# Altium PCB PCB1.PcbDoc
Units mm, origin at the board's own origin, x right, y up, seen from the top; angles counter-clockwise.
Board outline 90 x 60 mm, 2 copper layers (Top Layer, Bottom Layer); 25 components, 19 nets, 73 pads, 8 vias.
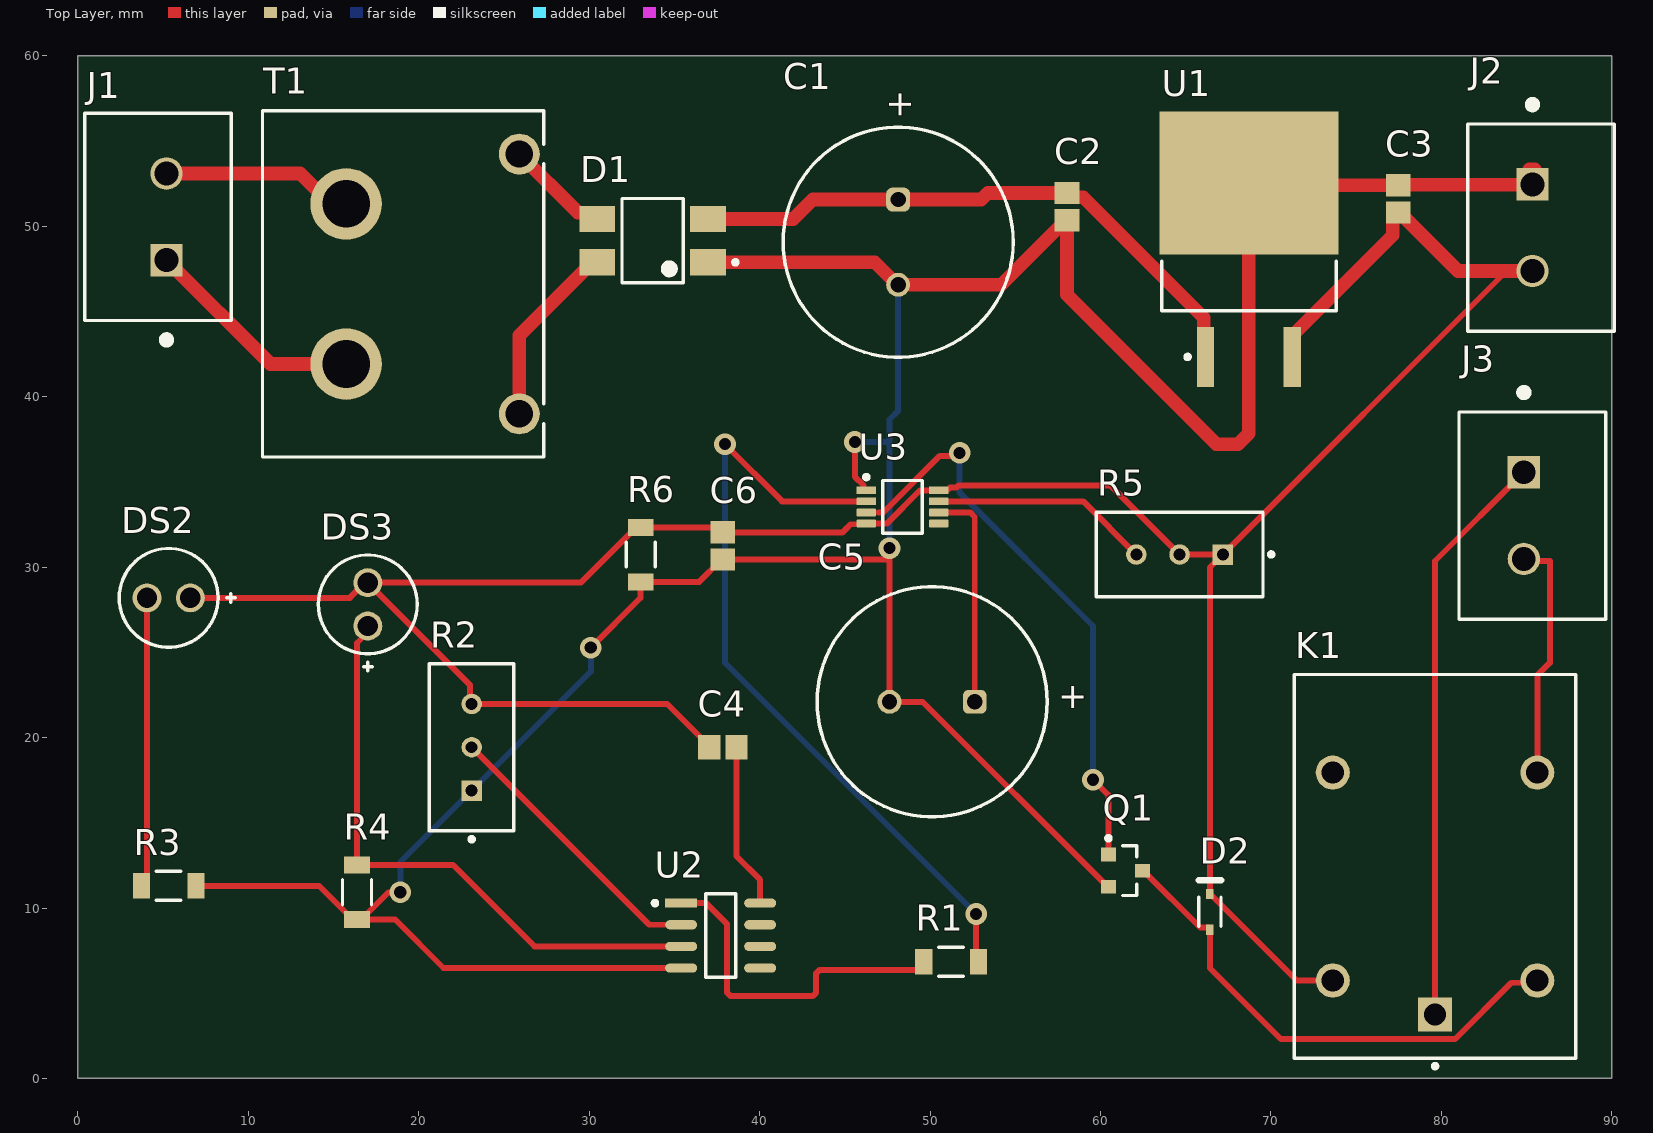
[diagram p0: Top Layer view]
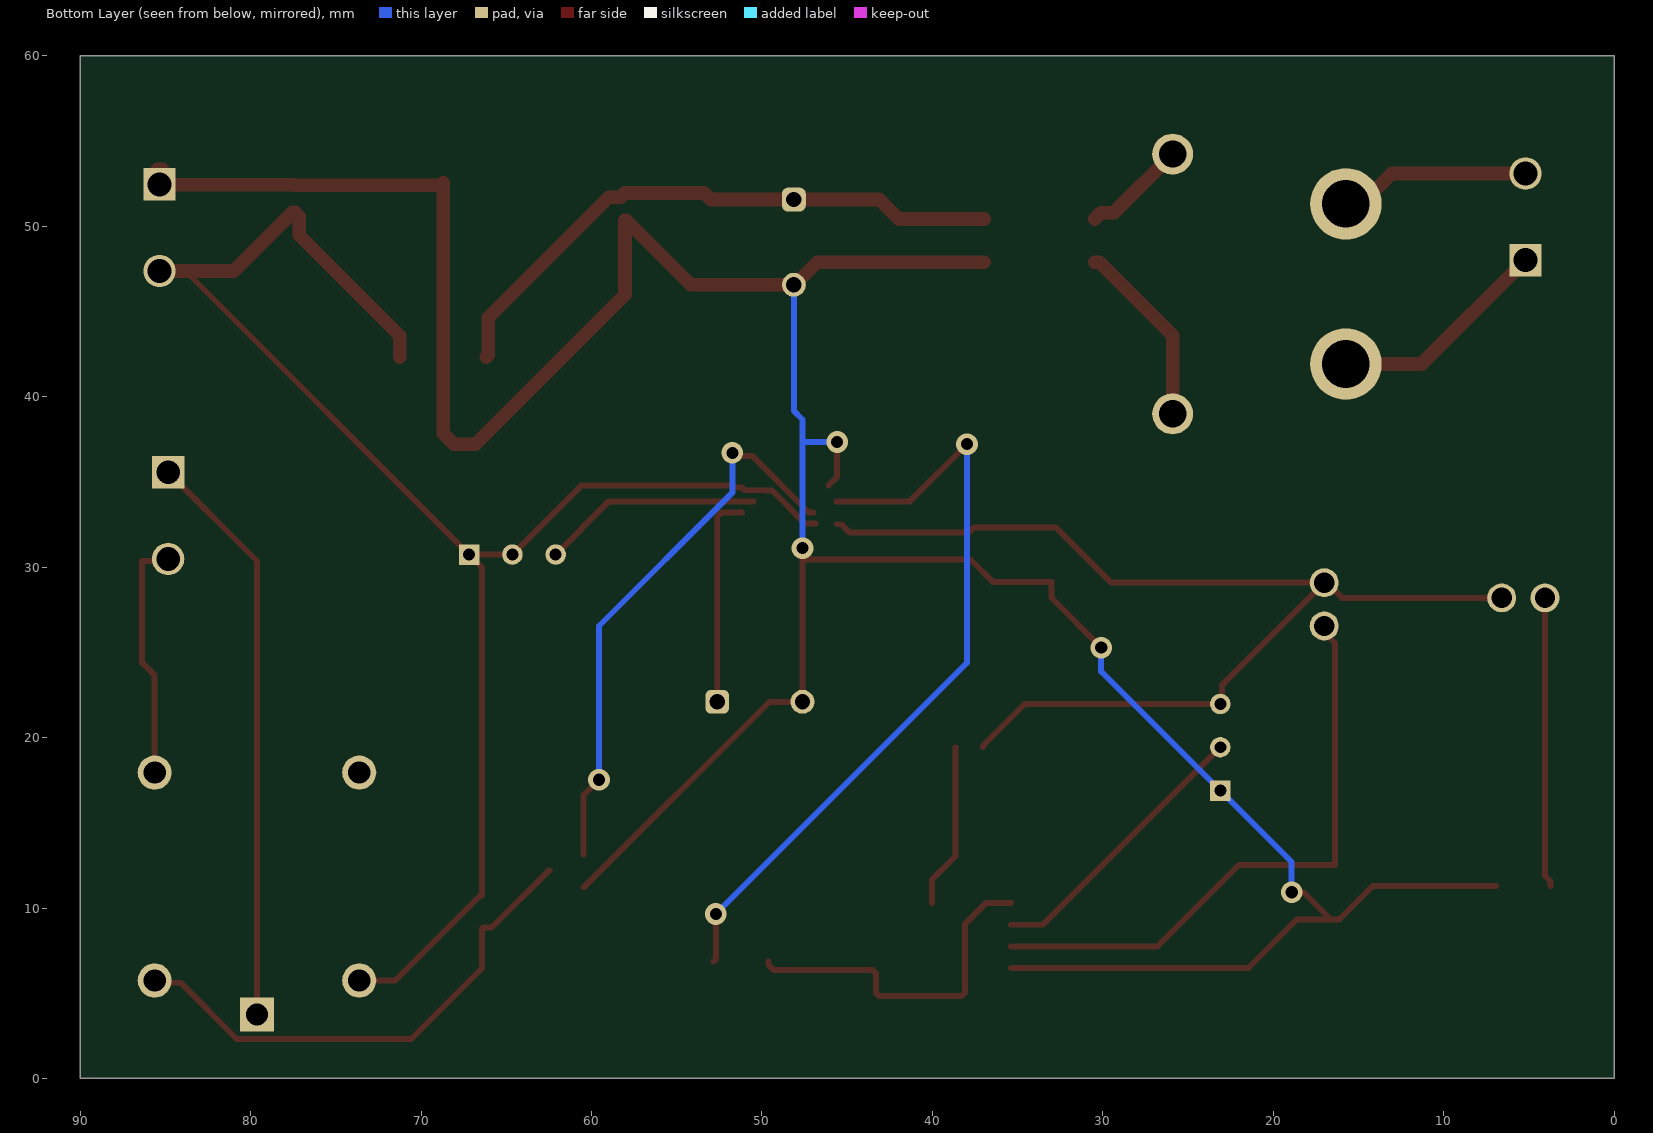
[diagram p1: Bottom Layer view, seen from below]
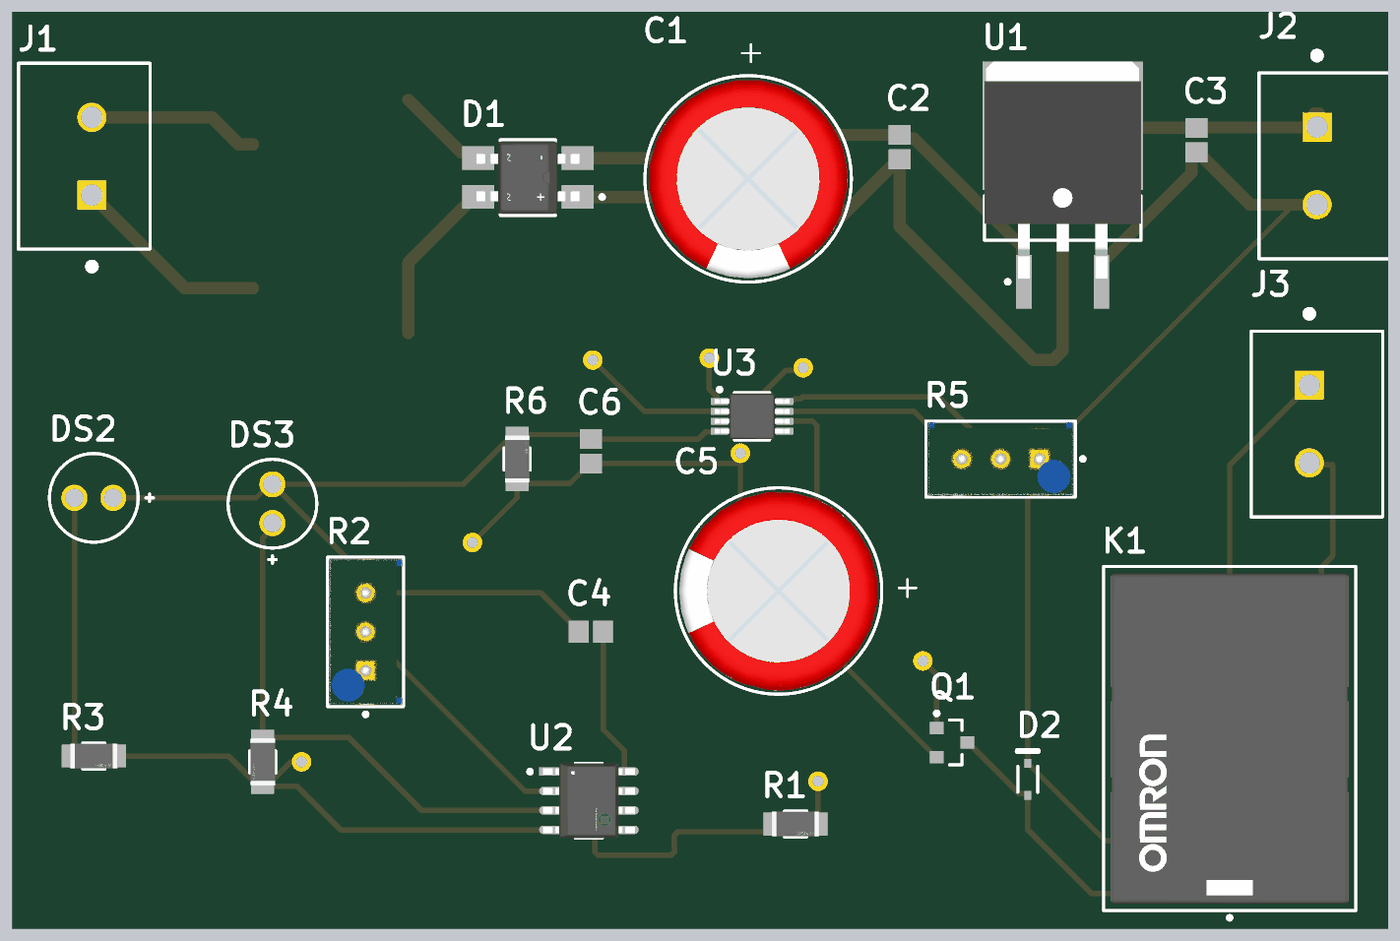
[diagram p2: 3D render of the assembled board from above, using the file's embedded part models]

## Layer stack, top to bottom
Top Solder: solder mask 0.0102, Solder Resist, Dk 3.5
Top Layer: signal copper 0.0356
Dielectric 1: dielectric 0.32, FR-4, Dk 4.8
Bottom Layer: signal copper 0.0356
Bottom Solder: solder mask 0.0102, Solder Resist, Dk 3.5

## Board outline
0,0 0,60 90,60 90,0

## Design rules (kind name [scope] priority, off if disabled: settings)
Clearance [All] p1: gap=0.1 ignorepadtopadclearanceinfootprint=FALSE
HoleSize [All] p1: absolutevalues=TRUE maxlimit=5 minlimit=0.025 maxpercent=80.000 minpercent=20.000
HoleToHoleClearance [All] p1: gap=0.1 allowstackedmicrovias=TRUE
MinimumSolderMaskSliver [All] p1: minsoldermaskwidth=0.1
PolygonConnect [All] p1: connectstyle=Relief reliefconductorwidth=0.254 reliefentries=4 polygonreliefangle="90 Angle" airgapwidth=0.254
RoutingVias [All] p1: holewidth=0.711 width=1.27 viastyle="Through Hole" minholewidth=0.711 minwidth=1.27 maxholewidth=0.711 maxwidth=1.27
SilkToSilkClearance [All] p1: silktosilkclearance=0.1
SilkToSolderMaskClearance [IsPad] p1: minsilkscreentomaskgap=0.1 clearancetoexposedcopper=TRUE
SolderMaskExpansion [All] p1: expansion=0 istentingtop=FALSE
SupplyNets "Schematic Supply Nets_1" [InNet('GND')] p1: voltage=0.000
SupplyNets "Schematic Supply Nets" [InNet('+5')] p2: voltage=0.000
Width [All] p1: maxlimit=5 minlimit=0.254 preferedwidth=0.35
25 further rules are at their usual default settings.

## Components (designator, comment, footprint, x,y, rotation, side; value= is the part's Value field where it differs from the comment)
C1 "470uF" WCAP-ATLI_D13H25 48.133,49.062 r90 top
C2 "0.1uF" CAPC2013X145X50NL20T25 58.039,51.143 r270 top
C3 "0.1uF" CAPC2013X145X50NL20T25 77.47,51.6 r90 top
C4 "0.1uF" CAPC2013X145X50NL20T25 37.846,19.431 r0 top
C5 "1000uF" WCAP-ATLI_D13H25 50.125,22.098 r0 top
C6 "0.1uF" CAPC2013X145X50NL20T25 37.846,31.242 r270 top
D1 "MB10S" FP-751EP-MFG 33.73,49.149 r180 top
D2 "1N4148WS-7-F" DIOD-SOD323-2-A_V 66.421,9.779 r90 top
DS2 "IR_TX1" VISH-TSAL6200 5.334,28.194 r180 top
DS3 "IR_RX1" VISH-TSAL6200 17.018,27.813 r90 top
J1 "1755736" PHOE-1755736-2_V 5.207,50.546 r90 top
J2 "1755736" PHOE-1755736-2_V 85.344,49.911 r270 top
J3 "1755736" PHOE-1755736-2_V 84.836,33.02 r270 top
K1 "G5LE-1-E DC5" FP-G5LE-1-E_DC5-MFG 79.629,12.446 r90 top
Q1 "BC847CLT1G" ONSC-SOT-23-3-318-08_V 61.468,12.192 r0 top
R1 "330" FP-AC1206-MFG 51.232,6.858 r0 top value=6.2KΩ
R2 "10k" FP-3296W-MFG#1 23.109,19.431 r0 top
R3 "100" FP-AC1206-MFG 5.334,11.303 r0 top value=6.2KΩ
R4 "1k" FP-AC1206-MFG 16.383,10.922 r270 top value=6.2KΩ
R5 "3296W-1-105LF" FP-3296W-MFG#2 64.643,30.734 r90 top
R6 "1k" FP-AC1206-MFG 33.02,30.734 r90 top value=191Ω
T1 "230VAC to 5VAC" WE-CSTLF_EI187 -1250.907,-1223.39 r180 top
U1 "MC7805CD2TR4G" ONSC-D2PAK-3-936-03_V 68.707,48.641 r90 top
U2 "LM358DR2G" FP-751-07-IPC_C 37.719,8.382 r0 top
U3 "LMC555CMMX" DGK0008A_L 48.387,33.528 r0 top

## Footprints (in the part's own frame and the unit in brackets; to place one, negate y for a bottom-side part, rotate by r counter-clockwise, add the part's x,y. Pads: shape width x height; smd on the part's side, far side on the other; paste and mask are expansions set on the pad)
CAPC2013X145X50NL20T25 [mm] "Chip Capacitor, 2-Leads, Body 2.00x1.25mm, IPC Medium Density"
  rect 1.3x1.45 smd: 1(-0.8,0) 2(0.8,0)
  body extent -1.1,-0.72 1.1,0.72, height 1.45
DGK0008A_L [mm] "TSOP, 8-Leads, Body 3.1x3.1mm, Pitch 0.65mm, IPC High Density"
  rrect22% 1.15x0.45 smd: 1(-2.125,0.975) 2(-2.125,0.325) 3(-2.125,-0.325) 4(-2.125,-0.975) 5(2.125,-0.975) 6(2.125,-0.325) 7(2.125,0.325) 8(2.125,0.975)
  silkscreen extent -2.25,-1.55 1.15,1.87, body extent -2.45,-1.5 2.45,1.5, height 0.94
DIOD-SOD323-2-A_V [mm] "SOD-323, 2-Leads, Body 1.7x1.3mm"
  rect 0.59x0.45 smd: 1(-1.055,0) 2(1.055,0)
  silkscreen extent -0.85,-0.65 1.85,0.65, body extent -0.85,-0.65 0.85,0.65, height 1.2
FP-751-07-IPC_C [mm]
  rect 1.874x0.543 smd paste+0 mask+0: 1(-2.316,1.905)
  rrect100% 1.874x0.543 smd paste+0 mask+0: 2(-2.316,0.635) 3(-2.316,-0.635) 4(-2.316,-1.905) 5(2.316,-1.905) 6(2.316,-0.635) 7(2.316,0.635) 8(2.316,1.905)
  silkscreen extent -3.98,-2.45 0.88,2.45, body extent -3.35,-2.55 3.35,2.55, height 0.25
FP-751EP-MFG [mm]
  rect 2.1x1.55 smd paste+0 mask+0: 1(-3.25,1.27) 2(-3.25,-1.27) 3(3.25,-1.27) 4(3.25,1.27)
  silkscreen extent -4.98,-2.47 1.8,2.47, body extent -4.4,-2.58 4.4,2.58, height 0.25
FP-3296W-MFG#1 [mm]
  rect 1.2x1.2 hole 0.7 paste-2539.97 mask+0: 1(0.005,-2.54)
  round 1.2 hole 0.7 paste-2539.97 mask+0: 2(0.005,0) 3(0.005,2.54)
  silkscreen extent -2.48,-5.52 2.48,4.89, body extent -2.58,-4.99 2.58,4.99, height 0.25
FP-3296W-MFG#2 [mm]
  rect 1.2x1.2 hole 0.7 paste-2539.97 mask+0: 1(0,-2.54)
  round 1.2 hole 0.7 paste-2539.97 mask+0: 2(0,0) 3(0,2.54)
  silkscreen extent -2.48,-5.5 2.48,4.89, body extent -2.58,-4.99 2.58,4.99, height 0.25
FP-AC1206-MFG [mm]
  rect 1x1.5 smd paste+0 mask+0: 1(-1.6,0) 2(1.6,0)
  silkscreen extent -0.72,-0.85 0.72,0.85, body extent -2.2,-0.95 2.2,0.95, height 0.25
FP-G5LE-1-E_DC5-MFG [mm]
  rect 2x2 hole 1.3 paste-2539.97 mask+0: 1(-8.7,0)
  round 2 hole 1.3 paste-2539.97 mask+0: 2(-6.7,-6) 3(5.5,-6) 4(5.5,6) 5(-6.7,6)
  silkscreen extent -11.85,-8.25 11.25,8.25, body extent -11.35,-8.35 11.35,8.35, height 0.25
ONSC-D2PAK-3-936-03_V [mm] "DPAK, 3-Leads, Body 10.24x9.35mm, Pitch 2.54mm"
  rect 3.504x1.016 smd: 1(-6.313,2.54) 3(-6.313,-2.54)
  rect 8.38x10.49 smd: 4(3.9,0)
  silkscreen extent -6.44,-5.12 -0.69,5.12, body extent -6.11,-5.13 8.09,5.13, height 4.75
ONSC-SOT-23-3-318-08_V [mm] "SOT23, 3-Leads, Body 2.92x1.3mm, Pitch 0.95mm"
  rect 0.9x0.8 smd: 1(-1,0.95) 2(-1,-0.95) 3(1,0)
  silkscreen extent -1.12,-1.46 0.65,2.02, body extent -0.65,-1.46 0.65,1.46, height 1.11
PHOE-1755736-2_V [mm] "THD, 2-Leads, Body 12.16x8.6mm, Pitch 5.08mm"
  rect 1.9x1.9 hole 1.4: 1(-2.54,0)
  round 1.9 hole 1.4: 2(2.54,0)
  silkscreen extent -7.42,-3.8 6.08,4.8, body extent -6.08,-3.8 6.08,4.8, height 12
VISH-TSAL6200 [mm] "THD, 2-Leads, Dia 5.8mm, Pitch 2.54mm"
  round 1.7 hole 1.2: 1(-1.27,0) 2(1.27,0)
  silkscreen extent -3.9,-2.9 2.9,2.9
WCAP-ATLI_D13H25 [mm] "Aluminum Electrolytic Capacitors, 13x25mm"
  rrect50% 1.4x1.4 hole 0.9: 1(2.5,0)
  round 1.4 hole 0.9: 2(-2.5,0)
  silkscreen extent -6.75,-6.75 6.75,6.75, body extent -6.49,-6.5 6.5,6.5, height 25.31
WE-CSTLF_EI187 [mm] "Current Sense Transformer, body 16.50 x 20.30 mm"
  round 4.2 hole 2.8: 1(-1266.655,-1274.7) 2(-1266.655,-1265.3)
  round 2.4 hole 1.6: 3(-1276.815,-1262.38) 4(-1276.815,-1277.62)
  silkscreen extent -1278.25,-1280.15 -1261.75,-1259.85, body extent -1277.82,-1279.65 -1262.19,-1260.35, height 16.81

## Part data
C1 C5: library part CMP-03913-54218056-2, "Cap, 2700Uf, 16V, Alu Elec, Radial Rohs Compliant: Yes", Capacitance=2.7mF, Case/Package=Radial, Leakage Current=432µA, Max Operating Temperature=105°C, Min Operating Temperature=-55°C, Ripple Current=3A, Tolerance=20%, Voltage Rating=16V, Diameter=13mm, Height - Seated (Max)=26.4922mm, Impedance=22mΩ, Lead Pitch=5.0038mm, Length=25mm, Life (Hours)=5000hours, Mount="Through Hole", Packaging="Tape & Box (TB)", Pitch=5mm, Polarity=Polar, RoHS=Compliant
C2 C3 C4 C6: library part CMP-2007-01227-1, Manufacturer=Kemet, Part Number=C0805S104K5RACTU
D1: library part CMP-07163-000045-1, "BRIDGE RECT 1P 1KV 500MA 4SOIC", Average Rectified Current=500mA, Capacitance=470pF, Case Code (Imperial)=1206, Case Code (Metric)=3216, Case/Package=SOIC, Forward Current=800mA, Forward Voltage=1V, Max Forward Surge Current (Ifsm)=35A, Max Operating Temperature=150°C, Max Power Dissipation=1.4W, Max Repetitive Reverse Voltage (Vrrm)=1kV, Min Operating Temperature=-55°C, Package Quantity=500, Peak Reverse Current=5uA, Tolerance=10%, Voltage Rating=500V, Contact Plating=Tin, Element Configuration=Single, Height=2.7mm, Height - Seated (Max)=0.354inch, Lead Free="Lead Free", Lead Pitch=0.197inch, Lead/Base Style="Formed Leads", Length=4.95mm, Max Surge Current=35A, Mount="Surface Mount", Number of Elements=1, Number of Pins=4, Packaging="Tape and Reel", Peak Non-Repetitive Surge Current=35A, Radiation Hardening=No, REACH SVHC="No SVHC", Reverse Voltage (DC)=1kV, Thickness=0.039inch, Weight=0.228g, Width=4.2mm
D2: library part CMP-1667-00004-1, "Fast Switching Diode, 75 V, 0.3 A, -65 to 150 degC, 2-Pin SOD323, RoHS, Tape and Reel", ComponentLink1Description="Manufacturer URL", ComponentLink1URL=http://www.diodes.com/, ComponentLink2Description=Datasheet, ComponentLink2URL=http://www.diodes.com/datasheets/ds30097.pdf, DatasheetVersion="Rev. 25-2, 03/2016", PackageDescription="2-Pin Small Outline Diode, Body 1.7 x 1.3 mm", PackageReference=SOD323-2
DS2 DS3: library part CMP-2000-07327-1, "High Power Infrared Emitting Diode, GaAlAs, MQW, 1.35 V, 100 mA, -40 to 85 degC, 2-Pin THD, RoHS, Bulk", Forward Current=100mA, Forward Voltage=3V, Manufacturer=Vishay, Operating Temp Range=-40Cto85C, Operating Temperature Classification=Industrial, Package Description="2-Pin Through Hole Device, Dia 5.8 mm, Pitch 2.54 mm", Package Reference=TSAL6200, Package Type=T-13/4, Power Dissipation=160W, Reverse Voltage=5V, Chip Material=GaAlAs, Datasheet URL=http://www.vishay.com/docs/81010/tsal6200.pdf, Datasheet Version="Rev. 2.4, 03/2014", DELETED=Compliant, High Brightness=Yes, Lens Dimensions=5x5x7.7mm, Lens Type=Colored, Lum Intensity=500mW/srmcd, Luminous Intensity=500mW/sr, Main Category=IrLED, Manufacturer URL=http://www.vishay.com/, Mounting=ThroughHole, Mounting Technology=ThroughHole, Number of  Elements=1, Packaging=Bulk, Peak Wavelength=950nm, Pin Count=2, Product Depth (mm)=5.8mm, Product Height (mm)=8.7mm, Product Length (mm)=5.8mm, Rad Hardened=No, Shape Type=Circular, Test Current (It)=100mA, Type=IrLED, Viewing Angle=34deg
J1 J2 J3: library part CMP-2000-05300-1, "Male Header, Pitch 5.08 mm, 1 x 2 Postion, Height 12 mm, Tail Length 3.9 mm, RoHS, Bulk", Colour=Green, Manufacturer="Phoenix Contact", Content=250pc(s), Datasheet URL=http://www.mouser.com/ds/2/324/ItemDetail_1755736-921028.pdf, Datasheet Version=Apr-16, Industrial packaging=Yes, Manufacturer part No.=1755736, Manufacturer URL=http://www.phoenixcontact.com/, Number of contacts=2, Pitch=5.08mm, Type=MSTBVA2,5/2-G-5,08
K1: library part CMP-08822-000286-1, "RELAY GEN PURPOSE SPDT 16A 5V", Coil Current=79.4mA, Coil Power=400mW, Coil Resistance=63R, Coil Voltage (DC)=5V, Contact Current Rating=16A, Max Operating Temperature=85°C, Max Voltage Rating (AC)=250V, Min Operating Temperature=-25°C, Package Quantity=100, Coil Type=Non-Latching, Contact Material=Tin, Depth=16.5mm, Height=19mm, Lead Free="Lead Free", Length=22.5mm, Life (Hours)=1000000Hour, Max Current Rating=16A, Mount=PCB, Number of Pins=5, Operate Time=10ms, Packaging=Rail/Tube, Power Consumption=400mW, Radiation Hardening=No, Relay Type="General Purpose", Release Time=5ms, RoHS Compliant=Yes, Series=G5LE, Termination=Solder, Throw Configuration=SPDT, Weight=12g, Width=16.5mm
Q1: library part CMP-1048-00770-1, "General Purpose Transistor, NPN Silicon, 3-Pin SOT-23, Pb-Free, Tape and Reel", Manufacturer="On Semiconductor", ComponentLink1Description="Manufacturer URL", ComponentLink1URL=http://www.onsemi.com/, ComponentLink2Description=Datasheet, ComponentLink2URL=http://www.onsemi.cn/pub_link/Collateral/BC846ALT1-D.PDF, ComponentLink3Description="Package Specification", ComponentLink3URL=http://www.onsemi.cn/pub_link/Collateral/318-08.PDF, DatasheetVersion="Rev. 11", fT Min (MHz)=100, IC Continuous (A)=0.1, Mounting Technology="Surface Mount", PackageDescription="3-Pin Small Outline Transistor, Body 2.92 x 1.3 mm, Pitch 0.95 mm", PackageReference=SOT-23-3-318-08, PackageVersion="Rev. AP, 11/2009", Packing="Tape and Reel", PartNumber=BC847CLT1G, Polarity=NPN, RoHS=TRUE
R1 R3 R4: library part CMP-03412-006130-1, "RES SMD 6.2K OHM 5% 1/4W 1206", Manufacturer=Yageo, Manufacturer Part Number=AC1206JR-076K2L, Package=AC1206, Power Rating=0.25W, Resistance=6.2KΩ, Temperature="-55°C to +155°C", Temperature Range High=+155°C, Temperature Range Low=-55°C, Tolerance=0.05, Voltage Rating=200V, Automotive=Yes, Automotive Grade="Grade 0", Category=Res, ComponentLink2Description=Datasheet, ComponentLink2URL=http://www.yageo.com/NewPortal/yageodocoutput?fileName=/pdf/R-Chip/PYu-AC_51_RoHS_L_6.pdf, Composition="Thick Film", Device Class L1="Passive Components", Device Class L2=Resistors, Device Class L3="Chip SMD Resistors", Digikey Description="RES SMD 6.2K OHM 5% 1/4W 1206", Footprint Url=http://www.yageo.com/exep/pages/download/literatures/PYu-R_Mount_10.pdf, Height=0.65mm, Ipc Land Pattern Name=RESC310160X55, Lead Free=Yes, Mouser Description="Thick Film Resistors - SMD 1/4W 6.2K ohm 5% AEC-Q200", Octopart=https://octopart.com/ac1206jr-076k2l-yageo-30511322, RoHS=TRUE, Series=AC
R2: library part CMP-1747-00001-8, "TRIMMER 10K OHM 0.5W PC PIN TOP", Color=Blue, Insulation Resistance=1GR, Max Operating Temperature=125°C, Max Power Dissipation=500mW, Min Operating Temperature=-55°C, Package Quantity=50, Resistance=10kR, Resistance Tolerance=10%, Resistor Type=Cermet, Temperature Coefficient=100ppm/°C, Contact Plating=Tin, Depth=4.83mm, Height=11.55mm, Lead Free="Lead Free", Length=9.53mm, Military Standard=Not, Mount="Through Hole", Number of Turns=25, Packaging=Rail/Tube, Power Rating=500mW, Radiation Hardening=No, Reach SVHC Compliant=Yes, RoHS Compliant=Yes, Series=3296, Taper=Linear, Technology=CERMET, Termination=Pin, Tolerance=10%, Weight=0.03oz, Width=9.53mm
R5: library part CMP-07234-000060-1, "TRIMMER 1M OHM 0.5W PC PIN TOP", Color=Blue, Max Operating Temperature=125°C, Max Power Dissipation=500mW, Min Operating Temperature=-55°C, Package Quantity=50, Resistance=1MR, Resistance Tolerance=10%, Resistor Type=Cermet, Temperature Coefficient=100ppm/°C, Voltage Rating=300V, Contact Plating=Tin, Depth=4.83mm, Height=0.395inch, Lead Diameter=0.5mm, Lead Free="Lead Free", Length=9.53mm, Military Standard=Not, Mount="Through Hole", Number of Turns=25, Packaging=Rail/Tube, Power Rating=500mW, Radiation Hardening=No, Reach SVHC Compliant=Yes, RoHS Compliant=Yes, Series=3296, Taper=Linear, Technology=CERMET, Termination=Pin, Tolerance=10%, Type=Potentiometer, Voltage Rating (DC)=300V, Weight=0.03oz, Width=9.53mm
R6: library part CMP-03412-028020-1, "RES SMD 191 OHM 1% 1/4W 1206", Manufacturer=Yageo, Manufacturer Part Number=AC1206FR-07191RL, Package=AC1206, Power Rating=0.25W, Resistance=191Ω, Temperature="-55°C to +155°C", Temperature Range High=+155°C, Temperature Range Low=-55°C, Tolerance=0.01, Voltage Rating=200V, Automotive=Yes, Automotive Grade="Grade 0", Category=Res, ComponentLink2Description=Datasheet, ComponentLink2URL=http://www.yageo.com/NewPortal/yageodocoutput?fileName=/pdf/R-Chip/PYu-AC_51_RoHS_L_6.pdf, Composition="Thick Film", Device Class L1="Passive Components", Device Class L2=Resistors, Device Class L3="Chip SMD Resistors", Digikey Description="RES SMD 191 OHM 1% 1/4W 1206", Footprint Url=http://www.yageo.com/exep/pages/download/literatures/PYu-R_Mount_10.pdf, Height=0.65mm, Ipc Land Pattern Name=RESC310160X55, Lead Free=Yes, Octopart=https://octopart.com/ac1206fr-07191rl-yageo-71368005, RoHS=TRUE, Series=AC
T1: library part CMP-03913-148624225-1, "Current Sense Transformer, 6.4H, Th Rohs Compliant: Yes"
U1: library part CMP-1679-00001-4, "Positive Voltage Regulator, 1 A, 5 V Output Voltage, 0 to 125 degC, 3-Pin D2PAK (936-03), Pb-Free, Tape and Reel", Manufacturer="ON Semiconductor", Max Operating Temperature="125 degC", Min Operating Temperature="0 degC", Package Quantity=800, ComponentLink1Description="Manufacturer URL", ComponentLink1URL=http://www.onsemi.com/, ComponentLink2Description=Datasheet, ComponentLink2URL=http://www.onsemi.com/pub_link/Collateral/MC7800-D.PDF, ComponentLink3Description="Package Specification", ComponentLink3URL=http://www.onsemi.com/pub_link/Collateral/936-03.PDF, DatasheetVersion="Rev. 27, 11/2014", Height="30.02 mm", Length="10.24 mm", Mount="Surface Mount", Mounting Technology="Surface Mount", PackageDescription="3-Pin Transistor Outline, Body 10.02 x 9.1945 mm, Pitch 2.54 mm", PackageReference=D2PAK-3-936-03, PackageVersion="Rev. E, 09/2015", Packaging="Tape and Reel", Pins=3, REACH SVHC="No SVHC", RoHSCompliant=true
U2: library part CMP-1310-00291-2, "IC OPAMP GP 2 CIRCUIT 8SOIC", Case/Package=SOIC, Dual Supply Voltage=9V, Input Bias Current=250nA, Input Offset Voltage (Vos)=7mV, Max Dual Supply Voltage=16V, Max Operating Temperature=70°C, Max Supply Voltage=32V, Min Dual Supply Voltage=1.5V, Min Operating Temperature=0°C, Min Supply Voltage=3V, Nominal Supply Current=1.2mA, Operating Supply Current=1.5mA, Output Current=40mA, Package Quantity=2500, Power Supply Rejection Ratio (PSRR)=65dB, Voltage Gain=100dB, Bandwidth=1MHz, Common Mode Rejection Ratio=65dB, Contact Plating=Tin, Gain Bandwidth Product=1MHz, Halogen Free="Halogen Free", Height=1.5mm, Lead Free="Lead Free", Length=5mm, Number of Amplifiers=2, Number of Channels=2, Number of Circuits=2, Number of Elements=2, Number of Pins=8, Operating Supply Voltage=16V, Output Current per Channel=40mA, Packaging="Tape and Reel", Radiation Hardening=No, REACH SVHC="No SVHC", Slew Rate=0.6V/µs, Width=4mm
U3: library part CMP-0056-00149-3, "CMOS Timer, 8-pin Mini SOIC", Manufacturer="Texas Instruments", PackageTopMarking=ZXTT*ZC5, PowerWise=N, Code_JEDEC=MO-187-AA, ComponentLink1Description="Datasheet URL", ComponentLink1URL=http://www.ti.com/general/docs/lit/getliterature.tsp?genericPartNumber=LMC555&fileType=pdf, CompType="Analog IC", PackageDescription="MINI SOIC, .118 x .118 x .034in, 8 Lead, .0256in Pitch", PackageReference=DGK0008A, PinCount=8, RoHS=N

## Via types
v1: diameter 1.27, hole 0.711, Top Layer to Bottom Layer, 8 vias

## Nets (pads, with @x,y where several pads share a name; then routed paths per layer and width w, separated by ;. In a path a pad name is that pad's centre, name@x,y a point inside that pad or via, vN(x,y) a via of type N, cw(c..) or ccw(c..) an arc to the next point about the centre after c; other vN are vias at no path point)
+5: C3.1 C4.1 C6.1 D2.2 DS2.1 DS3.2 J2.2 K1.5 R2.3 R5.1 R5.2 R6.2 U1.3 U3.4 U3.8 | length 162.1
  Top Layer w0.35: DS2.1 15.962,28.194 16.851,29.083 DS3.2 ; C4.1 37.046,19.506 34.581,21.971 R2.3 23.005,22.08 23.005,23.096 DS3.2 ; 45.593,32.512 45.339,32.512 45.085,32.258 45.085,32.247 44.88,32.042 C6.1 37.554,32.334 R6.2 32.77,32.334 29.519,29.083 DS3.2 ; 46.863,32.549 47.458,32.549 49.412,34.503 49.784,34.503 49.788,34.507 51.017,34.507 51.181,34.671 51.562,34.671 51.689,34.798 60.579,34.798 R5.2 R5.1 ; K1.5 71.509,5.746 66.541,10.714 66.471,10.714 66.421,10.764 D2.2 66.421,29.972 R5.1 ; 83.82,47.371 R5.1
  Top Layer w0.8: U1.3 71.247,43.572 77.145,49.47 77.145,50.55 77.395,50.8 C3.1 77.545,50.8 80.974,47.371 83.82,47.371 J2.2
GND: C1.2 C2.2 C3.2 C5.2 C6.2 D1.1 J2.1 Q1.2 R2.1 R3.2 R4.2 R6.1 U1.4 U2.4 U3.1 | length 193.2
  Top Layer w0.35: R3.2 14.152,11.303 16.133,9.322 R4.2 R4.2@16.633,9.322 ; v1(18.923,10.922) 18.233,10.922 R4.2@16.633,9.322 ; v1(30.099,25.273) 33.02,28.194 R6.1 36.463,29.134 37.771,30.442 C6.2 47.625,30.442 ; U2.4 21.463,6.477 18.618,9.322 R4.2@16.633,9.322 ; v1(45.593,37.338) 45.593,35.306 46.101,34.798 ; v1(47.625,31.115) 47.625,30.442 ; Q1.2 60.418,11.242 49.562,22.098 C5.2 47.625,30.442
  Top Layer w0.8: D1.1 46.763,47.879 48.08,46.562 C1.2 54.183,46.562 57.964,50.343 C2.2 58.039,45.974 66.802,37.211 68.072,37.211 68.707,37.846 U1.4 68.848,52.4 C3.2 77.495,52.425 85.318,52.425 J2.1 ; J2.1@85.173,53.34 J2.1@85.471,53.34
  Bottom Layer w0.35: v1(18.923,10.922) 18.923,12.7 R2.1 30.099,23.876 v1(30.099,25.273) ; v1(45.593,37.338) 47.625,37.338 ; v1(47.625,31.115) 47.625,37.338 ; C1.2 48.133,39.163 47.625,38.655 47.625,37.338
NetC1_1: C1.1 C2.1 D1.2 U1.1 | length 35.1
  Top Layer w0.8: D1.2 41.973,50.419 43.116,51.562 C1.1 53.008,51.562 53.389,51.943 C2.1 58.289,51.693 58.989,51.693 66.059,44.623 66.059,42.436 U1.1
NetC4_2: C4.2 U2.8 | length 9.7
  Top Layer w0.35: C4.2 38.646,13.043 40.035,11.654 U2.8
NetC5_1: C5.1 U3.6 | length 12.4
  Top Layer w0.35: 51.181,33.207 52.36,33.207 52.625,32.942 C5.1
NetD1_3: D1.3 T1.4 | length 6.2
  Top Layer w0.8: T1.4 29.344,50.794 30.105,50.794 D1.3
NetD1_4: D1.4 T1.3 | length 10.9
  Top Layer w0.8: T1.3 25.908,43.582 30.205,47.879 D1.4
NetD2_1: D2.1 K1.2 Q1.3 | length 30
  Top Layer w0.35: Q1.3 62.518,12.192 65.866,8.844 66.371,8.844 66.421,8.794 D2.1 66.421,6.477 70.581,2.317 80.807,2.317 84.104,5.614 85.497,5.614 K1.2
NetDS2_2: DS2.2 R3.1 | length 17
  Top Layer w0.35: R3.1 3.734,11.553 4.064,11.883 DS2.2
NetDS3_1: DS3.1 R4.1 U2.3 | length 35.3
  Top Layer w0.35: DS3.1 17.018,26.178 16.383,25.543 R4.1 22.022,12.522 26.797,7.747 U2.3
NetJ1_1: J1.1 T1.2 | length 13.1
  Top Layer w0.8: J1.1 11.303,41.91 T1.2
NetJ1_2: J1.2 T1.1 | length 11.3
  Top Layer w0.8: J1.2 13.052,53.086 14.828,51.31 T1.1
NetJ3_1: J3.1 K1.1 | length 34
  Top Layer w0.35: K1.1 79.629,30.353 J3.1
NetJ3_2: J3.2 K1.3 | length 14.3
  Top Layer w0.35: J3.2 84.963,30.353 86.36,30.353 86.36,24.38 85.629,23.649 K1.3
NetQ1_1: Q1.1 U3.3 | length 33.4
  Top Layer w0.35: 46.99,33.203 47.258,33.203 50.582,36.527 51.561,36.527 v1(51.737,36.703) ; v1(59.563,17.526) 60.468,16.621 Q1.1
  Bottom Layer w0.35: v1(51.737,36.703) 51.737,34.369 59.563,26.543 v1(59.563,17.526)
NetR1_1: R1.1 U2.1 | length 20.5
  Top Layer w0.35: U2.1 36.865,10.287 38.1,9.052 38.1,5.031 38.305,4.826 43.115,4.826 43.32,5.031 43.32,5.321 43.307,5.334 43.307,6.145 43.512,6.35 49.307,6.35 49.632,6.675 R1.1
NetR1_2: R1.2 U3.2 | length 45.6
  Top Layer w0.35: v1(37.973,37.211) 41.331,33.853 45.625,33.853 ; v1(52.705,9.652) 52.705,6.985 R1.2
  Bottom Layer w0.35: v1(37.973,37.211) 37.973,24.384 v1(52.705,9.652)
NetR2_2: R2.2 U2.2 | length 16.6
  Top Layer w0.35: R2.2 33.528,9.017 U2.2
NetR5_3: R5.3 U3.7 | length 12.9
  Top Layer w0.35: U3.7 58.984,33.853 R5.3
pads on no net: K1.4 U2.5 U2.6 U2.7 U3.5

## Silkscreen, mask and mechanical layers (free items; w line width, h text height)
Mechanical 1:
  the board outline again, w0.254

## Text inside footprints (layer, text, board x,y; h text height)
C1: Top Overlay "+" at 48.895,56.261 h1.5 r90
C5: Top Overlay "+" at 57.531,21.717 h1.5